# Altium PCB CC254x.PcbDoc
Units mm, origin at the board's own origin, x right, y up, seen from the top; angles counter-clockwise.
Board outline 25.9 x 26.25 mm, 2 copper layers (Top Layer, Bottom Layer); 59 components, 33 nets, 188 pads, 59 vias.
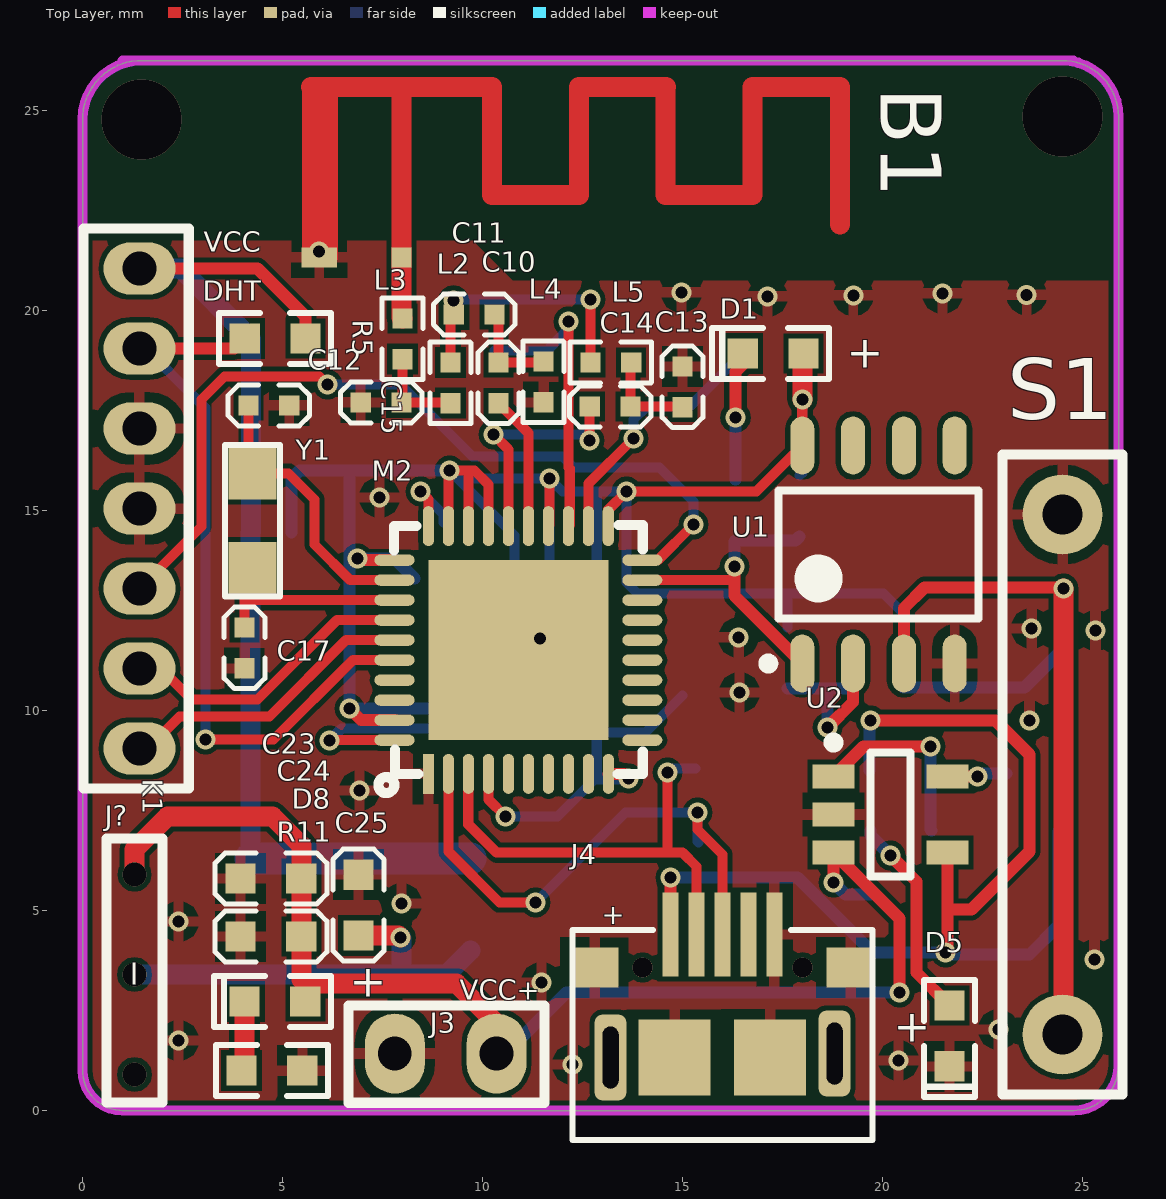
[diagram p0: Top Layer view]
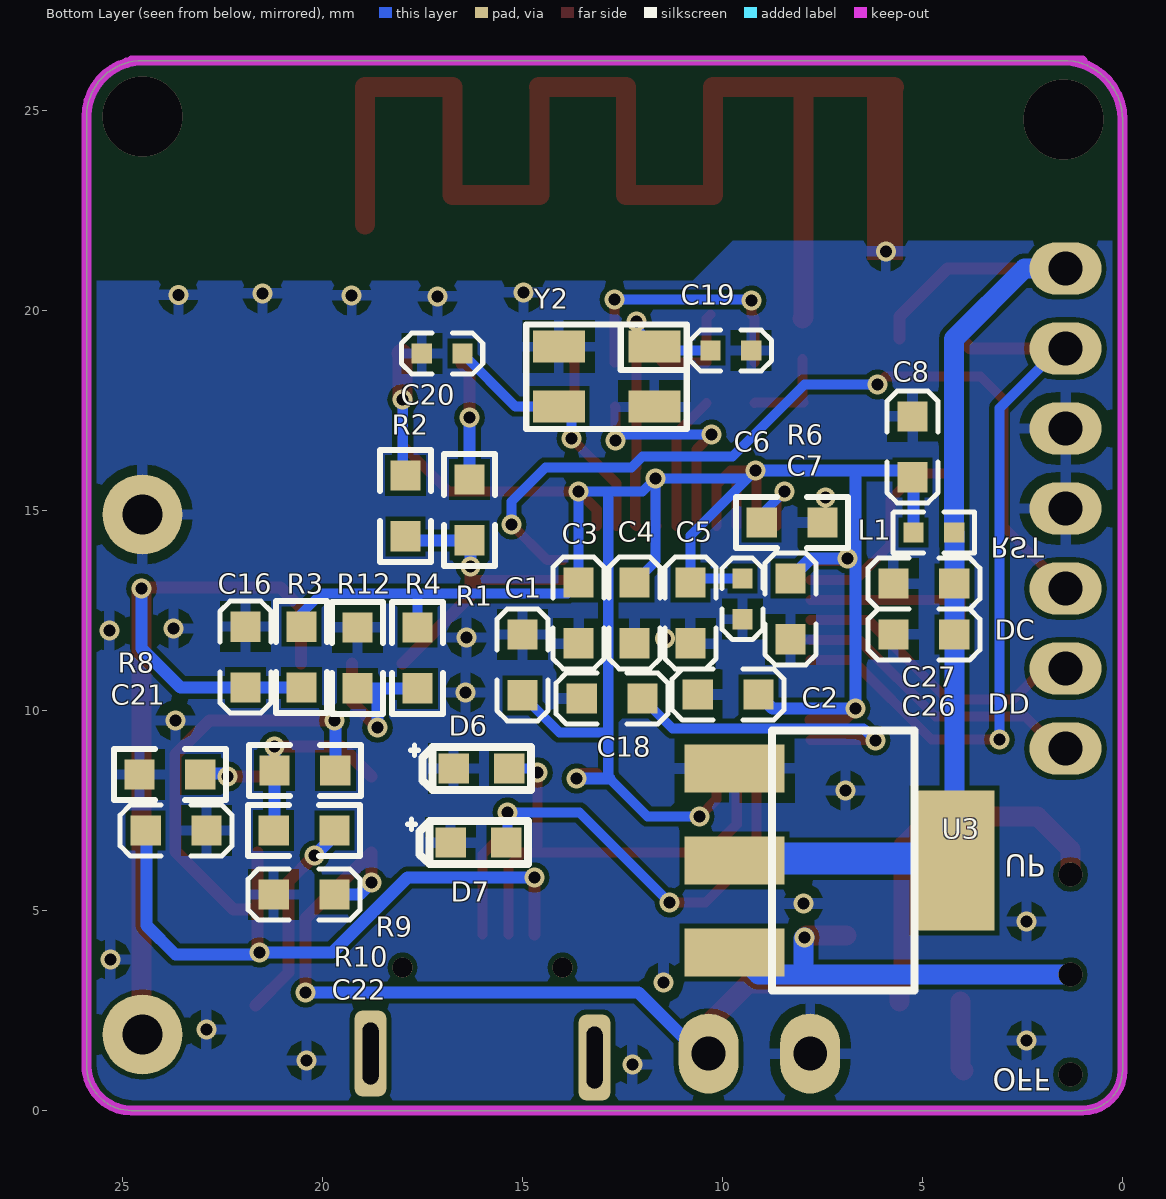
[diagram p1: Bottom Layer view, seen from below]
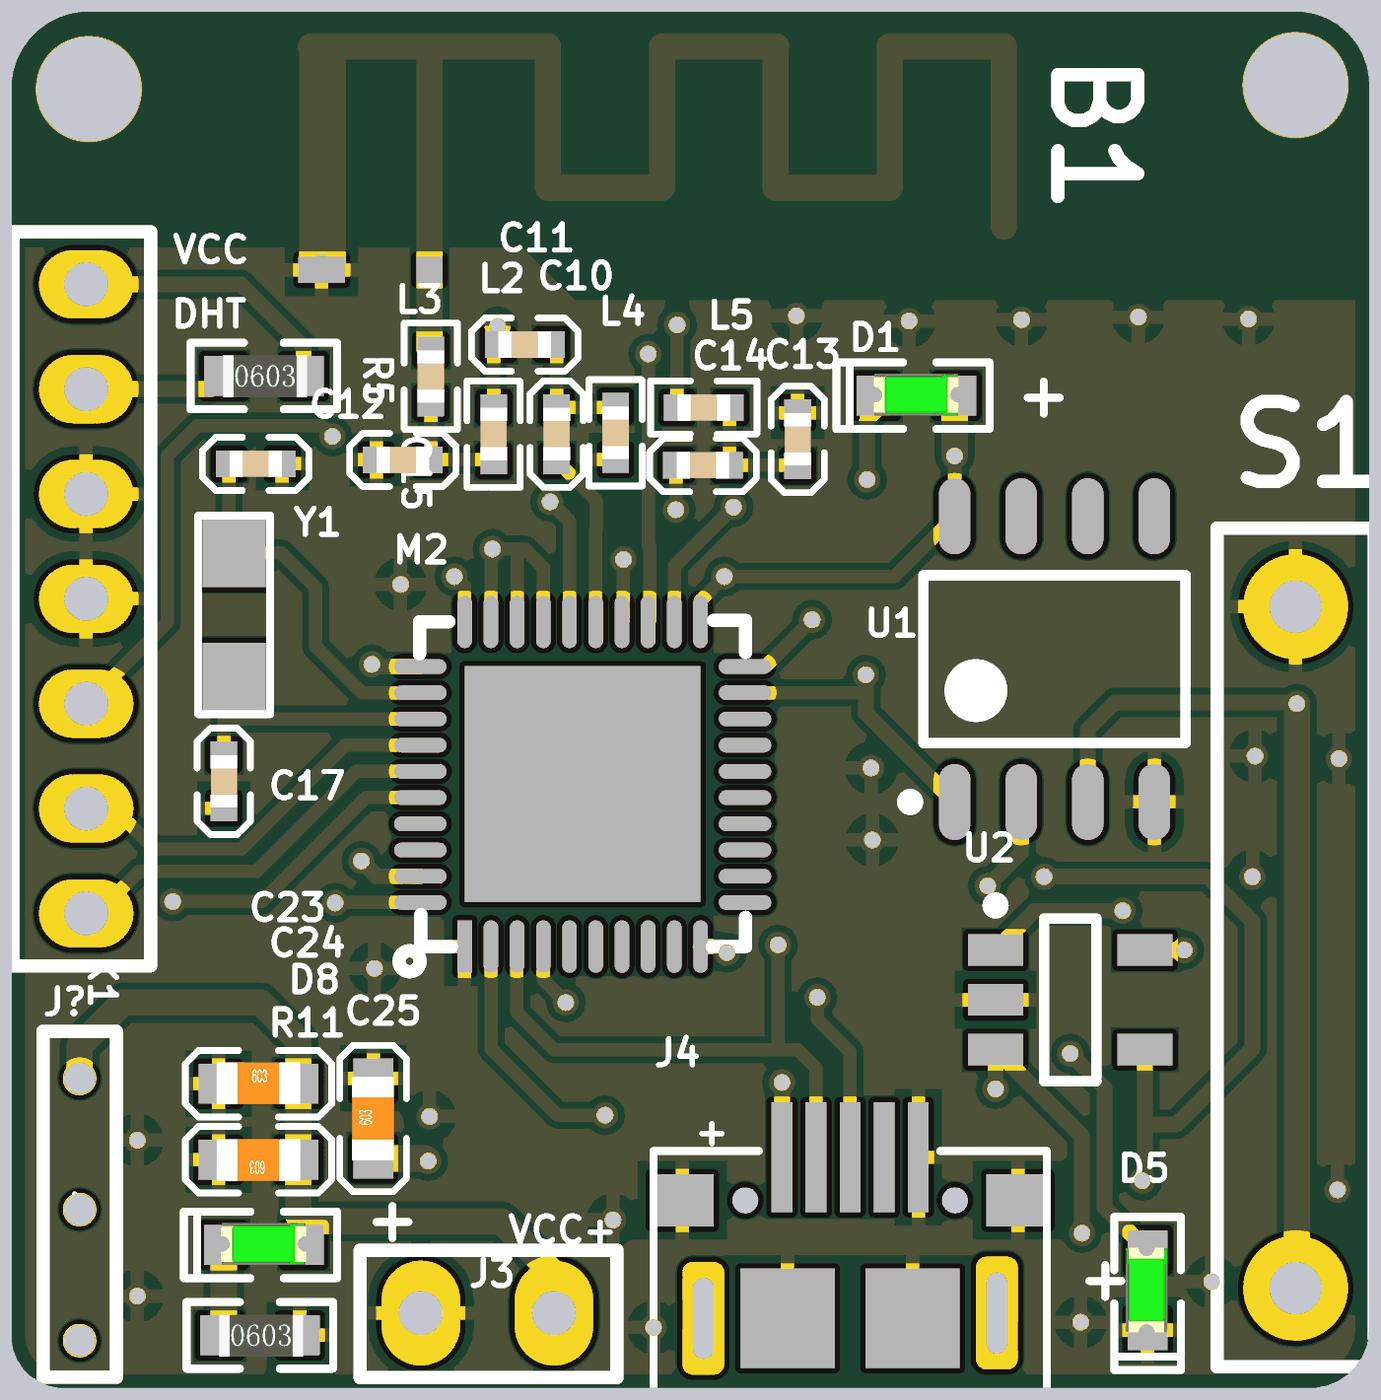
[diagram p2: 3D render of the assembled board from above, using the file's embedded part models]
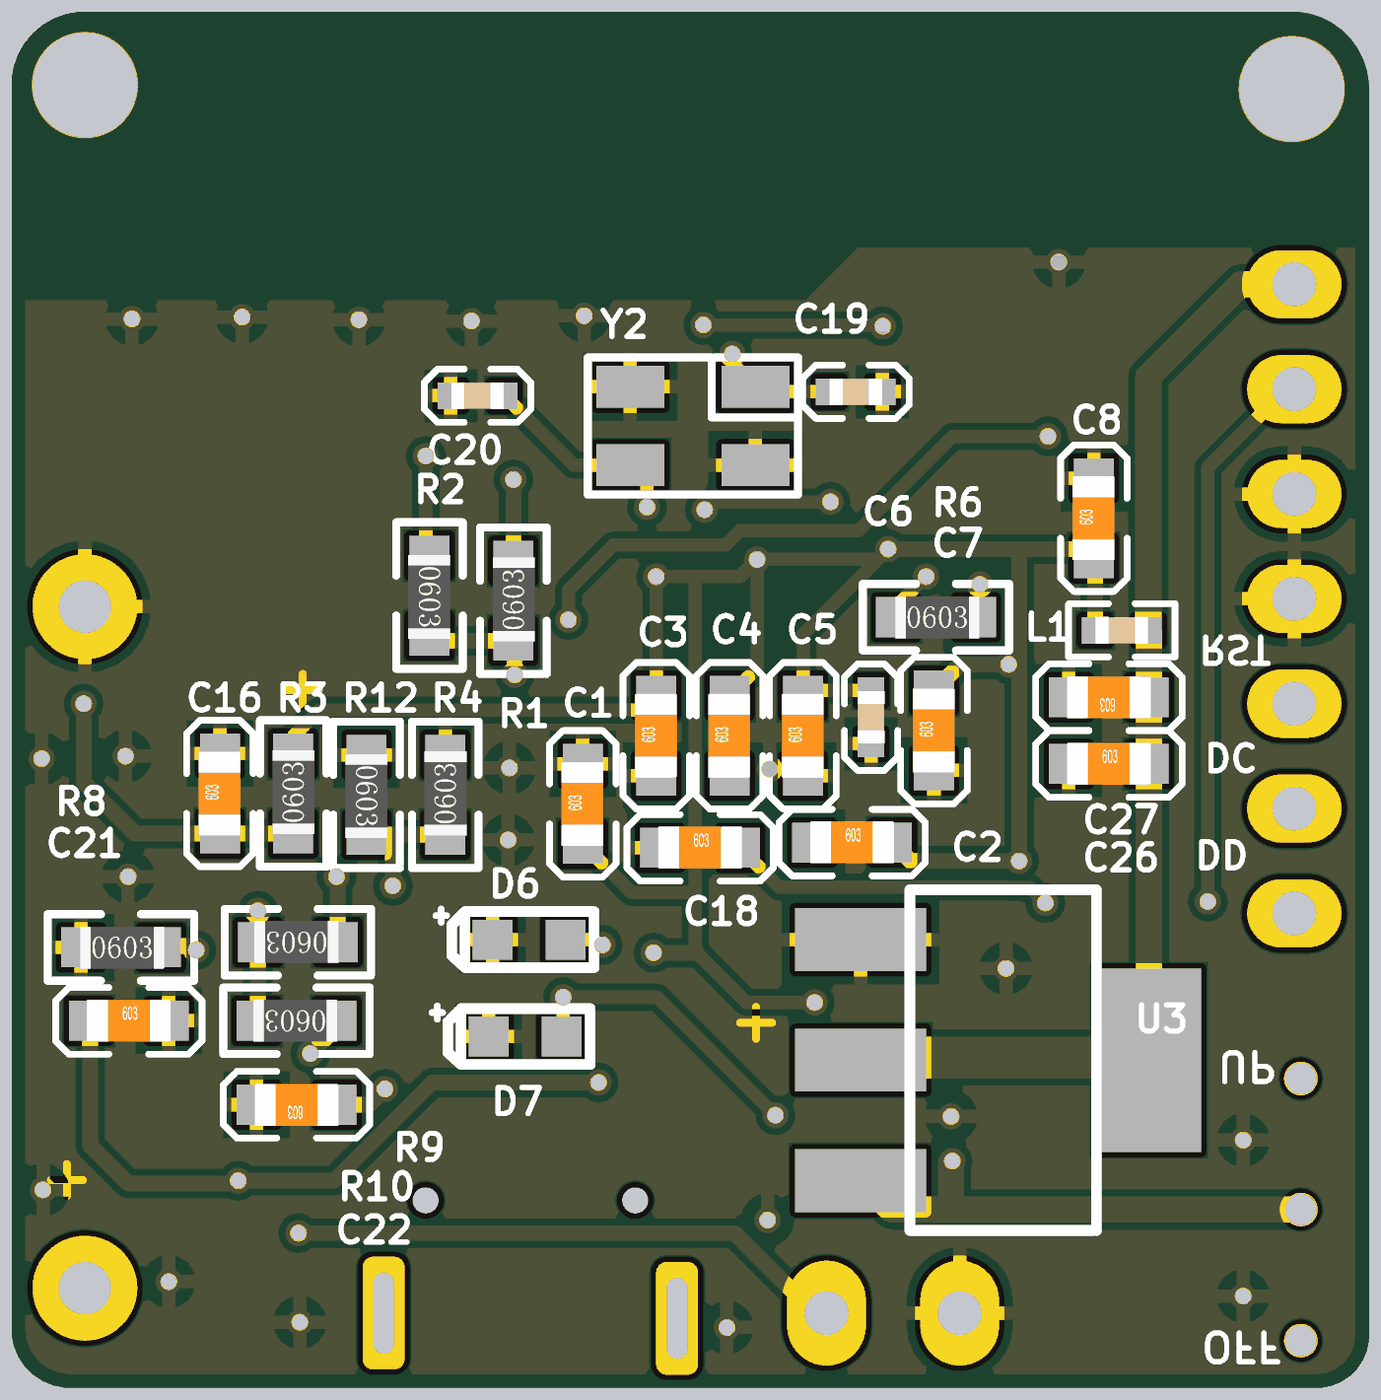
[diagram p3: 3D render of the assembled board from below, using the file's embedded part models]

## Layer stack, top to bottom
Top Solder: solder mask 0.0102, Solder Resist, Dk 3.5
Top Layer: signal copper 0.0356
Dielectric 1: dielectric 0.32, FR-4, Dk 4.8
Bottom Layer: signal copper 0.0356
Bottom Solder: solder mask 0.0102, Solder Resist, Dk 3.5

## Board outline
0,1 ccw(c1,1) 1,0 24.775,0 ccw(c24.775,1.125) 25.9,1.125 25.9,24.85 ccw(c24.5,24.85) 24.5,26.25 1.475,26.25 ccw(c1.475,24.775) 0,24.775

## Design rules (kind name [scope] priority, off if disabled: settings)
Clearance [All] p1: gap=0.127 except(0: Track-SMDPad)
PolygonConnect [All] p1: connectstyle=Relief reliefconductorwidth=0.254 reliefentries=4 polygonreliefangle="90 Angle" airgapwidth=0.254
RoutingVias [All] p1: holewidth=0.3 width=0.5 viastyle="Through Hole" minholewidth=0.3 minwidth=0.5 maxholewidth=0.5 maxwidth=0.8
SolderMaskExpansion [All] p1: expansion=0.102
Width [All] p1: maxlimit=0.8 minlimit=0.1 preferedwidth=0.3
30 further rules are at their usual default settings.

## Components (designator, comment, footprint, x,y, rotation, side; value= is the part's Value field where it differs from the comment)
B1 "BLE-ANT4" BLE-ANTS2 8,21.325 r0 top
C1 "104K50V" C0603 15,10.376 r90 bottom
C2 "105K16V" C0603 10.624,10.4 r180 bottom
C3 "104K50V" C0603 13.6,11.676 r90 bottom
C4 "104K50V" C0603 12.2,11.676 r90 bottom
C5 "104K50V" C0603 10.8,11.676 r90 bottom
C6 "220J10V" C0402 9.5,13.3 r270 bottom
C7 "104K50V" C0603 8.3,11.776 r90 bottom
C8 "225K16V" C0603 5.25,15.826 r90 bottom
C10 "18pF /10v" C0402 10.4,18.7 r270 top
C11 "1pF / 10v" C0402 9.284,19.9 r0 top
C12 "1pF / 10v" C0402 7.975,17.7 r180 top
C13 "1pF / 10v" C0402 15,17.584 r90 top
C14 "18pF /10v" C0402 13.7,17.6 r180 top
C15 "15pF / 10v" C0402 4.15,17.625 r0 top
C16 "104K50V" C0603 21.925,10.575 r90 bottom
C17 "15pF / 10v" C0402 4.05,12.075 r270 top
C18 "105K16V" C0603 13.524,10.3 r180 bottom
C19 "15pF / 10v" C0402 10.3,19 r180 bottom
C20 "27pF / 10v" C0402 16.501,18.925 r0 bottom
C21 "475K16V" C0603 24.424,7 r180 bottom
C22 "106K50V" C0603 19.7,5.4 r0 bottom
C23 "104K50V" C0603 3.95,5.8 r0 top
C24 "106K50V" C0603 5.474,4.35 r180 top
C25 "104K50V" C0603 6.9,4.375 r90 top
C26 "106K50V" C0603 5.725,11.9 r180 bottom
C27 "104K50V" C0603 4.201,13.175 r0 bottom
D1 "LED0603G(ORF)" D-LED0603G 18.025,18.925 r180 top
D5 "LED0603G" D-LED0603G 21.675,2.625 r270 top
D6 "ESDA_TR1/0603" HS_0603D 16.025,8.55 r180 bottom
D7 "ESDA_TR1/0603" HS_0603D 16.1,6.7 r180 bottom
D8 "LED0603G（NC）" D-LED0603G 5.574,2.725 r180 top
J3 "J-D2.54-1*2" D2.54-1*2P 10.35,1.425 r180 top
J4 "USB-MINI-SOCKET" "MICRO-USB - 5.9" 14.7,4.4 r0 top
J? "J-D2.0-1*7" D-2.0-1*7 1.425,21.05 r270 top
K1 "SS-12D00" SS-12D00 1.3,0.9 r90 top
L1 "L-0402-2nH" L0402 5.225,14.45 r180 bottom
L2 "L-0402-1nH" L0402 9.2,18.7 r270 top
L3 "L-0402-1nH" L0402 8,18.784 r90 top
L4 "L-0402-2nH" L0402 11.525,18.725 r270 top
L5 "L-0402-2nH" L0402 13.716,18.7 r180 top
M2 "CC2540" CC254X_QFN 8.647,8.517 r90 top
R1 "1KF" R0603 16.325,14.251 r90 bottom
R2 "10KF" R0603 17.925,15.875 r270 bottom
R3 "10KF" R0603 20.525,10.575 r90 bottom
R4 "5KF" R0603 17.625,10.551 r90 bottom
R5 "4.7KF(NC)" R0603 4.051,19.3 r0 top
R6 "56KF" R0603 9.024,14.7 r180 bottom
R8 "R0603-15KF" R0603 24.575,8.4 r180 bottom
R9 "470RF" R0603 19.676,8.5 r0 bottom
R10 "470RF" R0603 19.7,7 r0 bottom
R11 "1KF(NC)" R0603 3.975,1 r0 top
R12 "5KF" R0603 19.125,12.075 r270 bottom
S1 "sw420" sw420 24.5,1.9 r90 top
U1 "LM393-DR" LM393 19.9,13.9 r90 top
U2 "MCP73831" SOT23-5N 20.2,7.4 r0 top
U3 "AMS1117_3.3V" SOT-223 9.7,6.25 r270 bottom
Y1 "CRYSTAL_3215" CRYSTAL_3215 4.935,14.425 r90 top
Y2 "CY_3225" CY_3225 11.807,18.03 r0 bottom

## Footprints (in the part's own frame and the unit in brackets; to place one, negate y for a bottom-side part, rotate by r counter-clockwise, add the part's x,y. Pads: shape width x height; smd on the part's side, far side on the other; paste and mask are expansions set on the pad)
BLE-ANTS2 [mm]
  rect 0.5x0.5 smd: 1(-0.025,0)
  rect 0.889x0.5 smd: 2(-2.083,0)
  Top Layer region: -1.615,-0.066 -1.615,4.326 -2.515,4.326 -2.515,-0.066
  Top Layer lines w0.5: -2.288,4.263 -0.025,4.263 ; -0.025,0.125 -0.025,4.263 ; 6.59,4.263 6.579,4.263 ; 10.933,0.823 10.933,4.263 8.756,4.263 8.756,1.565 6.579,1.565 6.579,4.263 ; -0.025,4.263 2.235,4.263 2.235,1.565 4.412,1.565 4.412,4.263 6.579,4.263
C0402 [mil]
  rect 20x20 smd: 1(0,0) 2(40,0)
  silkscreen extent -20,-20 60,20, body extent 0,-10 40,10, height 20
C0603 [mil]
  rect 30x30 smd: 1(0,0) 2(60,0)
  silkscreen extent -25,-25 85,25, body extent -1,-15 61,16, height 12
CC254X_QFN [mm]
  rect 1x0.28 smd: 1(-0.1,0)
  oval 1x0.28 smd: 2(-0.1,-0.5) 3(-0.1,-1) 4(-0.1,-1.5) 5(-0.1,-2) 6(-0.1,-2.5) 7(-0.1,-3) 8(-0.1,-3.5) 9(-0.1,-4) 10(-0.1,-4.5) 21(6.094,-4.496) 22(6.094,-4) 23(6.094,-3.5) 24(6.094,-3) 25(6.094,-2.5) 26(6.094,-2) 27(6.094,-1.5) 28(6.094,-1) 29(6.094,-0.5) 30(6.094,0)
  oval 0.28x1 smd: 11(0.742,-5.348) 12(1.242,-5.348) 13(1.742,-5.348) 14(2.242,-5.348) 15(2.742,-5.348) 16(3.242,-5.348) 17(3.742,-5.348) 18(4.242,-5.348) 19(4.742,-5.348) 20(5.242,-5.348) 31(5.242,0.848) 32(4.742,0.848) 33(4.242,0.848) 34(3.742,0.848) 35(3.242,0.848) 36(2.742,0.848) 37(2.242,0.848) 38(1.742,0.848) 39(1.242,0.848) 40(0.742,0.848)
  rect 4.5x4.5 smd: 41(2.998,-2.25)
  silkscreen extent -0.58,-5.36 6.12,1.25
CRYSTAL_3215 [mm]
  rect 1.3x1.2 smd: 1(-0.864,0.686) 2(1.499,0.686)
  silkscreen extent -1.57,0 2.21,1.37
CY_3225 [mm]
  rect 1.3x0.8 smd: 1(-0.102,-1.067) 2(2.286,-1.067) 3(2.286,0.432) 4(-0.102,0.432)
  silkscreen extent -0.91,-1.63 3.1,0.99
D2.54-1*2P [mm]
  oval 1.5x2 hole 0.838: 1(0,0) 2(2.54,0)
  silkscreen extent -1.2,-1.2 3.7,1.23, body extent -1.1,-1.3 3.6,1.24, height 10
D-2.0-1*7 [mm]
  oval 1.3x1.8 hole 0.838: 1(0,0) 1(0,0) 2(2,0) 3(4,0) 4(6,0) 5(8,0) 6(10,0) 7(12,0)
  silkscreen extent -1,-1.4 13,1.23, body extent -1,-1.44 13,1.23, height 10
D-LED0603G [mil]
  rect 30x30 smd: 1(0,0) 2(60,0)
  silkscreen extent -25,-25 90,25, body extent -2,-16 62,15, height 24
HS_0603D [mil]
  rect 30x30 smd: 1(-27.5,0) 2(27.5,0)
  silkscreen extent -70,-21 49,23
L0402 [mil] "贴片电感"
  rect 20x20 smd: 1(0,0) 2(40,0)
  silkscreen extent -20,-20 60,20, body extent 0,-10 40,10, height 20
LM393 [mm] "SOP, 8-Leads, Body 4.90x3.90mm, Pitch 1.27mm, IPC Medium Density"
  oval 1.45x0.6 smd: 1(-2.725,1.905) 2(-2.725,0.635) 3(-2.725,-0.635) 4(-2.725,-1.905) 5(2.725,-1.905) 6(2.725,-0.635) 7(2.725,0.635) 8(2.725,1.905)
  silkscreen extent -2.85,-2.5 1.6,2.88, body extent -2,-2.5 2,2.5, height 1.75
"MICRO-USB - 5.9" [mm]
  rrect50% 0.8x2.15 hole 0.4 slot 1.55 at 90 deg: 0(-1.5,-3.075) 0(4.1,-2.975)
  rect 0.4x2.1 smd: 1(0,0) 2(0.65,0) 3(1.3,0) 4(1.95,0) 5(2.6,0)
  rect 1.2x1 smd: 6(-1.9,-0.825) 7(4.5,-0.825)
  rect 1.8x1.9 smd: 8(0.106,-3.075) 9(2.493,-3.075)
  round 0.5 hole 0.5 unplated: ""(-0.7,-0.825) ""(3.3,-0.825)
  silkscreen extent -2.45,-5.13 5.05,0.12
R0603 [mil]
  rect 30x30 smd: 1(0,0) 2(60,0)
  silkscreen extent -25,-25 85,25, body extent 0,-16 62,15, height 18
SOT23-5N [mm] "SOT23, 5-Leads, Body 2.90x2.70mm, Pitch 0.95mm, IPC Medium Density"
  rect 1.05x0.6 smd: 1(-1.425,0.95) 2(-1.425,0) 3(-1.425,-0.95) 4(1.425,-0.95) 5(1.425,0.95)
  silkscreen extent -1.55,-1.55 0.5,1.92, body extent -0.9,-1.55 0.9,1.55, height 1.45
SOT-223 [mm]
  rect 1.2x2.5 smd: 1(-2.3,0) 2(0,0) 3(2.3,0)
  rect 3.5x2 smd: 2(0,5.5)
  silkscreen extent -3.25,0.94 3.25,4.5
SS-12D00 [mm] "SS-12D00(1P2T) 立式 柄高5MM"
  round 0.6 hole 0.6: 1(0,0) 2(2.5,0) 3(5,0)
  silkscreen extent -0.7,-0.7 5.9,0.7
sw420 [mm] "常闭型 振动开关SW-420 高灵敏震动开关2708全方位感应传感器"
  round 2 hole 1: 1(0,0) 2(13,0)
  silkscreen extent -1.5,-1.5 14.5,1.5

## Part data
B1: library part ANT
C1 C3 C4 C5 C7 C16 C23 C25 C27: library part C0603X7R-104K50V, "贴片电容-陶瓷"
C2 C18: library part C0603X7R-105K16V, "贴片电容-陶瓷"
C6: library part C0402X7R-220J10V, "贴片电容-陶瓷"
C8: library part C0603X7R-225K16V, "贴片电容-陶瓷"
C10 C11 C12 C13 C14 C15 C17 C19 C20: library part C0402X7R-101J10V, "贴片电容-陶瓷"
C21: library part C0603X7R-475K16V, "贴片电容-陶瓷"
C22 C24 C26: library part C0603X7R-106K50V, "贴片电容-陶瓷"
D1 D5 D8: library part DLED-0603-G, "贴片二极管-LED"
D6 D7: library part "D Zener", "Zener Diode"
J3: library part J-D2.54-1*2单排
J4: library part J-USB-MINI-SOCKET, "USB-A卧式插座"
J?: library part J-D2.0-1*7单排
K1: library part "SS-12D00(1P2T) 立式 柄高5MM"
L1 L4 L5: "贴片电感-层叠"
L2 L3: library part L-0402-2.2nH, "贴片电感-层叠"
R1 R11: library part R0603-1KF, "贴片电阻-通用"
R2 R3 R4 R12: library part R0603-10KF, "贴片电阻-通用"
R5: library part R0603-4.7KF, "贴片电阻-通用"
R6: library part R0603-47KF, "贴片电阻-通用"
R8: "贴片电容-通用"
R9 R10: library part R0603-470RF, "贴片电阻-通用"
S1: "常闭振动传感器"
U1: "双路比较器"
U2: "charge IC"
U3: library part AMS1117-3.3V
Y1: "CRYSTAL_3215，两脚"

## Via types
v1: diameter 0.5, hole 0.3, Top Layer to Bottom Layer, tented both sides, 57 vias
v2: diameter 2, hole 2, Top Layer to Bottom Layer, tented both sides, 2 vias

## Nets (pads, with @x,y where several pads share a name; then routed paths per layer and width w, separated by ;. In a path a pad name is that pad's centre, name@x,y a point inside that pad or via, vN(x,y) a via of type N, cw(c..) or ccw(c..) an arc to the next point about the centre after c; other vN are vias at no path point)
+3.3V: C26.2 C27.1 J?.1 L1.2 R5.2 U3.2 | length 27.2
  Top Layer w0.3: J?.1@1.425,21.05 4.375,21.05 5.575,19.85 R5.2
  Bottom Layer w0.5: J?.1@1.425,21.05 2.45,21.05 4.209,19.291 L1.2 4.2,14.441 U3.2@4.2,6.3
  Bottom Layer w0.8: U3.2@4.2,6.3 U3.2@9.7,6.3
BT2: C22.1 C23.2 C24.1 D8.1 J3.1 K1.3 U2.3 | length 32.3
  Top Layer w0.3: v1(18.775,5.7) U2.3 20.425,4.8 v1(20.425,2.95)
  Top Layer w0.5: K1.3 1.3,6.525 2.125,7.35 4.75,7.35 5.474,6.626 C23.2 C24.1 5.474,3.275 5.574,3.175 ; D8.1 5.574,3.175 ; J3.1@10.375,1.225 10.375,2.15 9.35,3.175 5.574,3.175
  Bottom Layer w0.3: J3.1@10.375,1.225 12.1,2.95 v1(20.425,2.95) ; v1(18.775,5.7) 19.075,5.4 C22.1
D0: M2.19 R1.1 R2.2 U1.1 | length 7.7
  Top Layer w0.254: M2.19 16.266,13.259 16.3,13.225
  Top Layer w0.3: v1(16.3,13.6) 16.3,13.225 16.3,12.87 U1.1
  Bottom Layer w0.3: v1(16.3,13.6) 16.3,14.226 R1.1 17.825,14.251 R2.2
DC: J?.6 M2.34 | length 7.6
  Top Layer w0.254: J?.6@1.525,11.485 2.735,10.275 4.375,10.275 6.359,12.259 M2.34
DD: J?.7 M2.35 | length 7.4
  Top Layer w0.254: J?.7@1.525,8.945 2.43,9.85 4.675,9.85 6.584,11.759 M2.35
DHT12: J?.2 M2.36 R5.1 | length 18.8
  Top Layer w0.254: v1(3.075,9.275) 4.775,9.275 6.759,11.259 M2.36
  Top Layer w0.3: J?.2@1.45,19.025 J?.2 3.801,19.05 R5.1
  Bottom Layer w0.254: J?.2@1.525,19.105 3.075,17.555 v1(3.075,9.275)
GND: B1.2 C1.2 C2.1 C3.1 C4.1 C5.1 C6.2 C7.1 C8.2 C12.2 C13.2 C15.2 C16.2 C17.2 C18.1 C19.2 C20.2 C21.2 C22.2 C23.1 C24.2 C25.2 C26.1 C27.2 D5.2 D6.1 D7.1 J3.2 J4.5 J4.6 J4.7 J4.8 J4.9 J?.3 J?.4 L4.2 M2.1 M2.41 R6.2 R8.1 R11.2 R12.1 S1.2 U1.4 U2.2 U3.1 Y2.2 Y2.4
  other v1: 12.25,1.15 20.4,1.25 2.4,1.75 22.9,2.025 11.475,3.2 25.3,3.775 2.4,4.725 7.975,5.175 6.925,8 23.675,9.75 16.425,10.45 11.435,11.803 16.4,11.825 25.325,12 23.725,12.05 7.425,15.325 17.125,20.35 19.272,20.375 23.602,20.389 21.5,20.425 14.975,20.45 5.917,21.475
NetB1_1: B1.1 L3.2 | length 1.7
  Top Layer w0.5: B1.1@7.975,21.475 7.975,19.825 L3.2
NetC10_1: C10.1 C11.2 L4.1 | length 2.4
  Top Layer w0.254: C11.2 10.4,19.8 C10.1 11.5,18.7 L4.1
NetC10_2: C10.2 M2.25 | length 3.4
  Top Layer w0.254: C10.2 11.152,16.932 11.152,16.352 11.147,16.347 M2.25
NetC11_1: C11.1 L2.1 L5.2 | length 6.6
  Top Layer w0.254: L2.1 9.2,19.816 9.275,19.891 v1(9.275,20.25) ; L5.2 v1(12.7,20.275)
  Bottom Layer w0.254: v1(9.275,20.25) 9.3,20.275 v1(12.7,20.275)
NetC12_1: C12.1 L2.2 L3.1 | length 2.3
  Top Layer w0.254: L3.1 8,17.725 C12.1 9.184,17.7 L2.2
NetC13_1: C13.1 C14.1 L5.1 | length 2.4
  Top Layer w0.254: L5.1 13.7,18.684 C14.1 14.984,17.6 C13.1
NetC14_2: C14.2 M2.26 | length 5.8
  Top Layer w0.254: v1(10.275,16.9) 10.647,16.528 M2.26 ; v1(12.675,16.75) 12.675,17.591 C14.2
  Bottom Layer w0.254: v1(10.275,16.9) 12.525,16.9 v1(12.675,16.75)
NetC15_1: C15.1 M2.32 Y1.2 | length 7.1
  Top Layer w0.254: C15.1 4.15,16.023 Y1.2 5.15,15.925 5.8,15.275 5.8,14.15 6.691,13.259 M2.32
NetC16_1: C16.1 R3.1 S1.1 U1.3 | length 22.7
  Top Layer w0.3: U1.3 20.535,12.56 21.05,13.075 24.5,13.075 v1(24.525,13.05) ; S1.1 S1.1@24.525,1.925
  Top Layer w0.5: S1.1@24.525,1.925 v1(24.525,13.05)
  Bottom Layer w0.3: R3.1 C16.1 23.55,10.575 24.525,11.55 v1(24.525,13.05)
NetC17_1: C17.1 M2.33 Y1.1 | length 5.3
  Top Layer w0.254: C17.1 4.05,12.775 ; Y1.1 4.05,13.362 4.05,12.775 ; M2.33 4.066,12.759 4.05,12.775
NetC18_2: C18.2 M2.40 | length 7.9
  Top Layer w0.254: v1(6.175,9.25) 6.184,9.259 M2.40
  Bottom Layer w0.254: v1(6.175,9.25) 6.471,9.546 6.884,9.546 6.888,9.55 11.25,9.55 C18.2
NetC19_1: C19.1 M2.23 Y2.1 | length 7.4
  Top Layer w0.254: M2.23 12.18,14.643 12.18,16.042 12.147,16.075 v1(12.147,19.722)
  Bottom Layer w0.254: C19.1 11.612,19 Y2.1@11.707,19.095 ; Y2.1 12.147,19.538 v1(12.147,19.722)
NetC20_1: C20.1 M2.22 Y2.3 | length 6.5
  Top Layer w0.254: M2.22 12.647,15.672 v1(13.775,16.8)
  Bottom Layer w0.254: v1(13.775,16.8) 13.775,17.276 Y2.3@14.096,17.598 ; Y2.3 Y2.3@14.096,17.598 ; C20.1 15.174,17.598 Y2.3@14.096,17.598
NetD1_2: D1.2 R1.2 | length 3
  Top Layer w0.3: v1(16.325,17.325) 16.325,18.475 D1.2@16.525,18.675
  Bottom Layer w0.3: R1.2 v1(16.325,17.325)
NetD5_1: D5.1 R10.1 | length 5.2
  Top Layer w0.3: v1(20.2,6.375) 20.852,5.723 20.852,3.448 D5.1
  Bottom Layer w0.3: R10.1 19.7,6.875 v1(20.2,6.375)
NetD8_2: D8.2 R11.1 | length 1.8
  Top Layer w0.5: R11.1 4.05,1.075 D8.2
NetM2_30: M2.30 R6.1 | length 2
  Top Layer w0.254: v1(8.45,15.475) 8.647,15.278 M2.30
  Bottom Layer w0.254: v1(8.45,15.475) 9.024,14.901 R6.1
NetR4_1: R4.1 R12.2 U1.2 | length 4.4
  Top Layer w0.3: v1(18.625,9.575) 19.265,10.215 U1.2
  Bottom Layer w0.3: R4.1 18.575,10.551 ; v1(18.625,9.575) 18.625,10.501 18.575,10.551 ; R12.2 18.575,10.551
NetR8_2: R8.2 U2.5 | length 1.5
  Top Layer w0.3: U2.5 v1(22.375,8.35)
  Bottom Layer w0.3: v1(22.375,8.35) 22.45,8.425 R8.2@23.101,8.425
NetR9_2: R9.2 R10.2 U2.1 | length 4.8
  Top Layer w0.3: U2.1 19.525,9.1 v1(21.2,9.1)
  Bottom Layer w0.3: v1(21.2,9.1) R9.2 21.2,7.024 R10.2
RESET: J?.5 M2.20 | length 21.4
  Top Layer w0.254: J?.5 2.975,14.6 2.975,17.775 3.55,18.35 5.925,18.35 v1(6.125,18.15) ; M2.20 14.384,13.759 v1(15.275,14.65)
  Bottom Layer w0.254: v1(6.125,18.15) 7.95,18.15 9.75,16.35 12,16.35 12.275,16.075 14.425,16.075 15.275,15.225 v1(15.275,14.65)
USB_M/SDA: D6.2 J4.2 M2.3 | length 11.9
  Top Layer w0.254: M2.3 9.643,8.413 9.643,7.157 10.354,6.446 14.625,6.446 ; v1(14.625,8.45) 14.625,6.446 ; J4.2 15.35,6.1 15.004,6.446 14.625,6.446
  Bottom Layer w0.254: v1(14.625,8.45) 14.725,8.55 D6.2
USB_P/SCL: D7.2 J4.3 M2.2 | length 13.7
  Top Layer w0.254: M2.2 9.147,6.478 10.425,5.2 v1(11.325,5.2) ; v1(15.375,7.45) 15.375,7.025 16,6.4 J4.3
  Bottom Layer w0.254: v1(11.325,5.2) 13.575,7.45 v1(15.375,7.45) 15.375,6.726 D7.2
VBUS: C21.1 J4.1 R9.1 U2.4 | length 27.8
  Top Layer w0.3: J4.1 v1(14.7,5.825) ; v1(19.7,9.75) 22.825,9.75 23.675,8.9 23.675,6.475 22.225,5.025 21.65,5.025 21.625,5 ; v1(21.575,3.95) 21.625,4 21.625,5 ; U2.4 21.625,5
  Bottom Layer w0.3: v1(14.7,5.825) 17.875,5.825 19.75,3.95 v1(21.575,3.95) 21.627,3.898 23.673,3.898 24.4,4.625 24.4,6.976 C21.1 ; R9.1 19.676,9.726 v1(19.7,9.75)
VCC3.3V: C1.1 C2.2 C3.2 C4.2 C5.2 C6.1 C7.2 C8.1 D1.1 L1.1 M2.4 M2.10 M2.21 M2.24 M2.27 M2.28 M2.29 M2.31 M2.39 R2.1 R3.2 R4.2 U1.8 | length 71.8
  Top Layer w0.254: M2.29 v1@9.147,15.947 ; v1(9.175,16) 9.8,16 10.147,15.653 M2.27 ; M2.28 9.647,15.925 ; M2.4 10.147,7.778 v1(10.575,7.35) ; M2.24 11.676,14.639 v1(11.676,15.801) ; M2.21 13.143,15.018 v1(13.6,15.475) 16.845,15.475 U1.8 v1(17.995,17.775)
  Top Layer w0.3: v1(6.675,10.05) 6.966,9.759 M2.39 ; v1(6.875,13.8) 6.916,13.759 M2.31 ; M2.10 13.533,8.417 v1(13.65,8.3)
  Top Layer w0.5: v1(17.995,17.775) 17.995,18.895 D1.1
  Bottom Layer w0.254: v1(9.175,16) 9.374,15.801 ; C6.1 10.7,13.3 C5.2 10.8,14.375 9.374,15.801 ; v1(10.575,7.35) 11.874,7.35 12.824,8.3 12.858,8.334 12.858,9.45 ; C4.2 11.676,13.724 v1(11.676,15.801) ; C1.1 14.074,9.45 12.858,9.45 ; R4.2 17.625,12.925 ; R2.1 17.995,15.945 v1(17.995,17.775) ; R3.2 20.525,12.425 20.025,12.925 17.625,12.925 ; 9.374,15.801 v1(11.676,15.801) ; v1(11.676,15.801) 12.001,15.475 12.858,15.475 ; 12.858,9.45 12.858,15.475 ; 12.858,15.475 v1(13.6,15.475) C3.2 13.875,12.925 17.625,12.925
  Bottom Layer w0.3: L1.1 5.225,15.801 C8.1 5.424,16 6.7,16 ; C7.2 7.8,13.8 v1(6.875,13.8) v1@6.675,13.8 ; C2.2 8.75,10.05 v1(6.675,10.05) v1@6.675,13.8 ; v1(9.175,16) 9.173,16.002 6.702,16.002 6.7,16 ; 12.824,8.3 v1(13.65,8.3) ; v1@6.675,13.8 6.675,15.975 6.7,16
VIN: C25.1 K1.2 U3.3 | length 10.7
  Top Layer w0.5: C25.1 7.9,4.375 v1(7.95,4.325)
  Bottom Layer w0.5: K1.2 7.975,3.4 ; v1(7.95,4.325) 7.975,4.3 7.975,3.4 ; U3.3@9.7,4 9.1,3.4 7.975,3.4
pads on no net: J4. J4.0 J4.4 K1.1 M2.5 M2.6 M2.7 M2.8 M2.9 M2.11 M2.12 M2.13 M2.14 M2.15 M2.16 M2.17 M2.18 M2.37 M2.38 U1.5 U1.6 U1.7
copper on no net:
  other v2: 1.475,24.775 24.5,24.85

## Polygon pours and split planes (outlines as drawn)
GND on Bottom Layer "GND_L02_P038" (solid, remove dead copper, pour order 38): 0,0 0,21.75 9.5,21.75 9.75,21.75 10.75,20.75 25.9,20.75 26,20.65 26,0 0,0
GND on Top Layer "GND_L01_P040" (solid, remove dead copper, pour order 40): 0,0 0,21.75 9.75,21.75 10.75,20.75 25.9,20.75 25.9,0.1 26,0 0,0

## Keep-outs
Keep-Out Layer:
  lines w0.254: 0,1 ccw(c1,1) 1,0 ; 0,1 ccw(c1,1) 1,0 ; 0,1 ccw(c1,1) 1,0 ; 0,1 ccw(c1,1) 1,0 ; 0,1 0,24.775 ; 0,1 0,24.775 ; 0,1 0,24.775 ; 0,1 0,24.775 ; 0,24.775 cw(c1.475,24.775) 1.475,26.25 ; 0,24.775 cw(c1.475,24.775) 1.475,26.25 ; 0,24.775 cw(c1.475,24.775) 1.475,26.25 ; 0,24.775 cw(c1.475,24.775) 1.475,26.25 ; 1,0 24.775,0 ; 1,0 24.775,0 ; 1,0 24.775,0 ; 1,0 24.775,0 ; 1.475,26.25 5.075,26.25 ; 1.475,26.25 5.075,26.25 ; 1.475,26.25 5.075,26.25 ; 1.475,26.25 5.075,26.25 ; 5.075,26.25 24.5,26.25 ; 5.075,26.25 24.5,26.25 ; 5.075,26.25 24.5,26.25 ; 5.075,26.25 24.5,26.25 ; 24.5,26.25 cw(c24.5,24.85) 25.9,24.85 ; 24.5,26.25 cw(c24.5,24.85) 25.9,24.85 ; 24.5,26.25 cw(c24.5,24.85) 25.9,24.85 ; 24.5,26.25 cw(c24.5,24.85) 25.9,24.85 ; 24.775,0 ccw(c24.775,1.125) 25.9,1.125 ; 24.775,0 ccw(c24.775,1.125) 25.9,1.125 ; 24.775,0 ccw(c24.775,1.125) 25.9,1.125 ; 24.775,0 ccw(c24.775,1.125) 25.9,1.125 ; 25.9,1.125 25.9,24.85 ; 25.9,1.125 25.9,24.85 ; 25.9,1.125 25.9,24.85 ; 25.9,1.125 25.9,24.85 ; 1,26.25 24.775,26.25 1,26.25 ; 25.9,1 25.9,24.775 25.9,1

## Silkscreen, mask and mechanical layers (free items; w line width, h text height)
Top Overlay:
  text "VCC" at 3.025,21.475 h0.5
  text "DHT" at 3,20.25 h0.5
  text "+" at 19.1,18.575 h0.8
  text "+" at 6.675,2.85 h0.8
  text "VCC+" at 9.425,2.775 h0.5
  text "+" at 20.275,1.725 h0.8
Bottom Overlay:
  text "RST" at 3.3,14.325 h0.5 r180
  text "DC" at 3.2,12.275 h0.5 r180
  text "DD" at 3.375,10.425 h0.5 r180
Bottom Solder:
  text "+" at 19.75,13 h0.8
  text "+" at 11.1,6.65 h0.8
  text "+" at 24.25,3.65 h0.8

## Dimensions
1,0 to 1.475,26.25 on Keep-Out Layer
0,1 to 25.9,1.125 on Keep-Out Layer
0,1 to 25.9,1.125 on Keep-Out Layer
1,0 to 1.475,26.25 on Keep-Out Layer

## Text inside footprints (layer, text, board x,y; h text height)
J4: Top Overlay "+" at 12.987,4.652 h0.5
K1: Top Overlay "I" at 1.4,3.7 h0.55 r180; Bottom Overlay "OFF" at 3.25,1.05 h0.55 r180; Bottom Overlay "UP" at 2.95,6.4 h0.55 r180